# EAGLE board GPS_radiologger_v17 (EAGLE 9.6.2)
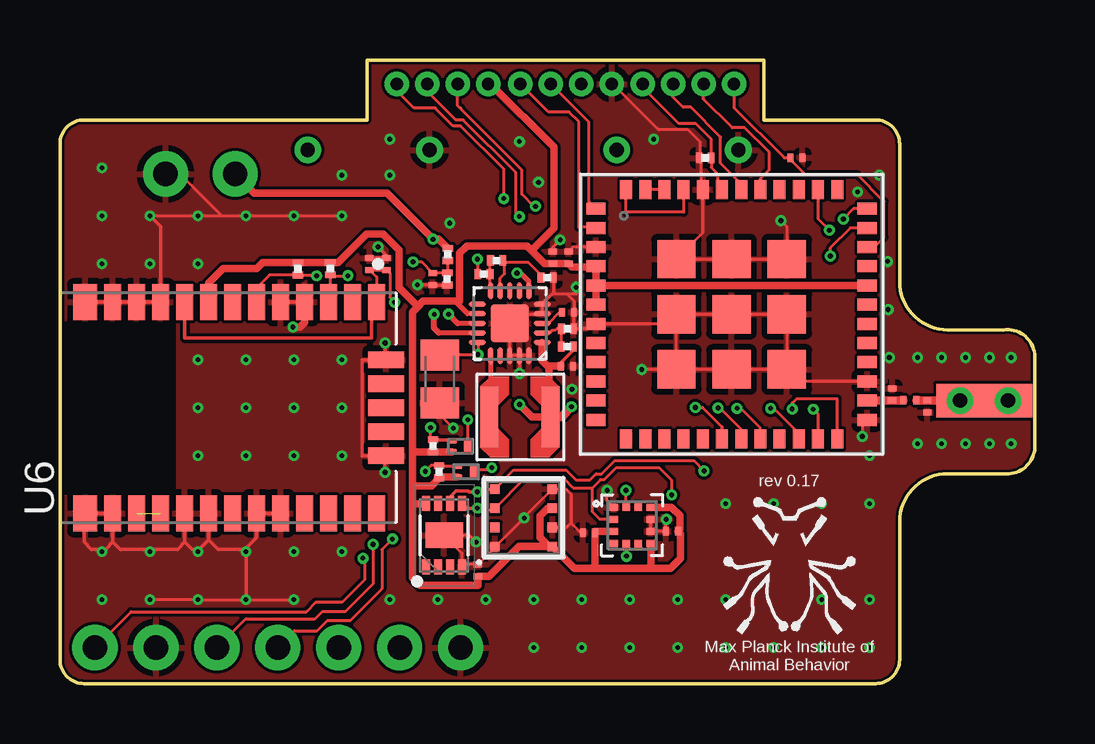
[diagram p0: board, top side]
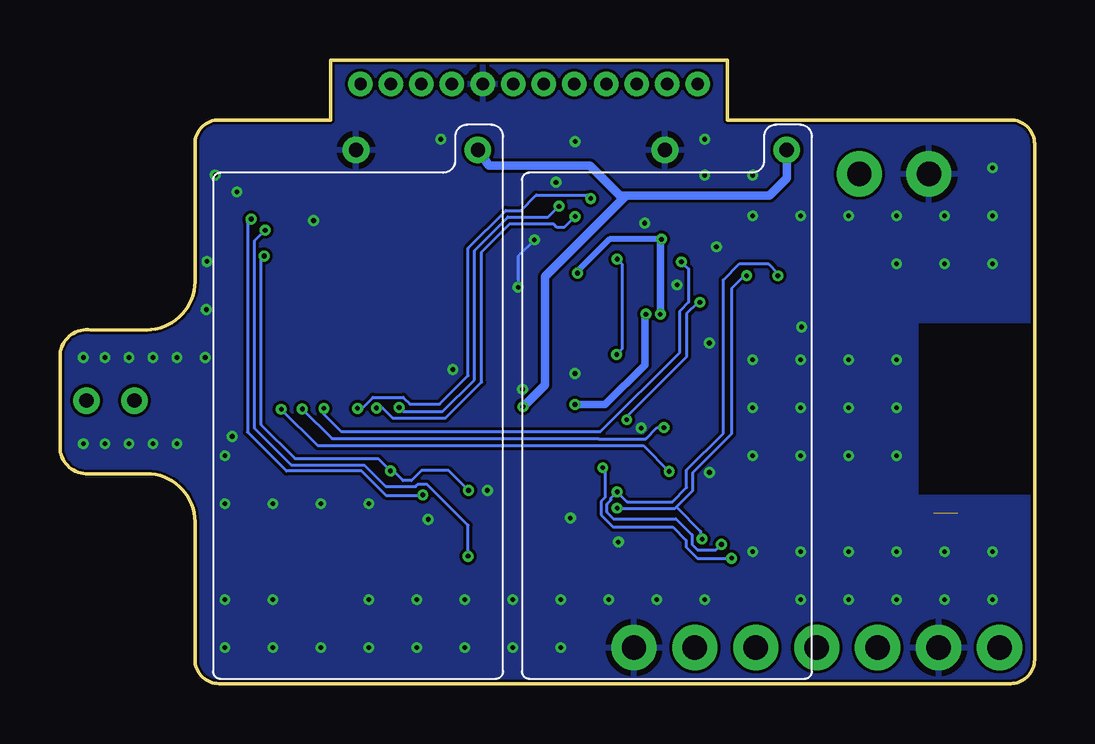
[diagram p1: board, bottom side, seen from below]

Size 40.62 x 26 mm. Coordinates in mm from the lower left corner, seen from the top.
Outline: 35,6.75 35,1 arc-90 34,0 1,0 arc-90 0,1 0,22.5 arc-90 1,23.5 12.8,23.5 12.8,26 29.35,26 29.35,23.5 34,23.5 arc-90 35,22.5 35,16.75 arc90 37,14.75 39.35,14.75 arc-90 40.62,13.75 40.62,9.75 arc-90 39.35,8.75 37,8.75 arc90 35,6.75
Copper layers (1*16): Top 0.035mm / dielectric 0.2mm / Bottom 0.035mm
Design rules "default *": minimum track width 5mil, minimum drill 0.2mm, track to track 5mil, track to pad 5mil, pad to pad 5mil, via to via 5mil, smd to smd 5mil, copper to edge 4mil, drill to drill 4mil, minimum pad ring 10mil, minimum via ring 5mil, stop-mask expansion 0mil, vias tented up to drill 12mil, thermal gap 10mil
Net classes: 1 power: width 0.305 mm; 2 antenna: width 0.356 mm, clearance 0.178 mm; 3 battery: width 0.254 mm

## Footprints (pad centres in the part's own frame; a part is rotated, then mirrored left to right if it is on the bottom)
C0201 = smd 0.25 x 0.35: 1 -0.25,0; 2 0.25,0
L0201 = smd 0.25 x 0.35: 1 -0.275,0; 2 0.275,0
C0805K = smd 1.3 x 1.6: 1 -1,0; 2 1,0
SON50P300X200X55-9N = smd 0.63 x 0.32: 1 -1.33,0.75; 2 -1.33,0.25; 3 -1.33,-0.25; 4 -1.33,-0.75; 5 1.33,-0.75; 6 1.33,-0.25; 7 1.33,0.25; 8 1.33,0.75 | smd 1.06 x 1.56: 9 0,0
1X01_NO_SILK = drill 1.016 pad 1.88: 1 0,0
1X04_1.27MM_NO_SILK = drill 0.508 pad 1: 1 0,0; 2 1.27,0; 3 2.54,0; 4 3.81,0
1X07_NO_SILK = drill 1.016 pad 1.88: 1 0,0; 2 2.54,0; 3 5.08,0; 4 7.62,0; 5 10.16,0; 6 12.7,0; 7 15.24,0
SOT883(B) = smd 0.4 x 0.25: 1 -0.35,0.225; 2 -0.35,-0.225 | smd 0.4 x 0.7: 3 0.35,0
R0201 = smd 0.28 x 0.43: 1 -0.255,0; 2 0.255,0
TYPEABZ = smd 0.8 x 0.5: P$1 -5.65,4.4; P$2 -5.65,3.6; P$3 -5.65,2.8; P$4 -5.65,2; P$5 -5.65,1.2; P$6 -5.65,0.4; P$7 -5.65,-0.4; P$8 -5.65,-1.2; P$9 -5.65,-2; P$10 -5.65,-2.8; P$11 -5.65,-3.6; P$12 -5.65,-4.4; P$25 5.65,-4.4; P$26 5.65,-3.6; P$27 5.65,-2.8; P$28 5.65,-2; P$29 5.65,-1.2; P$30 5.65,-0.4; P$31 5.65,0.4; P$32 5.65,1.2; P$33 5.65,2; P$34 5.65,2.8; P$35 5.65,3.6; P$36 5.65,4.4 | smd 0.5 x 0.8: P$13 -4.4,-5.2; P$14 -3.6,-5.2; P$15 -2.8,-5.2; P$16 -2,-5.2; P$17 -1.2,-5.2; P$18 -0.4,-5.2; P$19 0.4,-5.2; P$20 1.2,-5.2; P$21 2,-5.2; P$22 2.8,-5.2; P$23 3.6,-5.2; P$24 4.4,-5.2; P$37 4.4,5.2; P$38 3.6,5.2; P$39 2.8,5.2; P$40 2,5.2; P$41 1.2,5.2; P$42 0.4,5.2; P$43 -0.4,5.2; P$44 -1.2,5.2; P$45 -2,5.2; P$46 -2.8,5.2; P$47 -3.6,5.2; P$48 -4.4,5.2 | smd 1.6 x 1.6: P$49 -2.3,2.3; P$50 0,2.3; P$51 2.3,2.3; P$52 -2.3,0; P$53 0,0; P$54 2.3,0; P$55 -2.3,-2.3; P$56 0,-2.3; P$57 2.3,-2.3
XDCR_BMA400 = smd 0.35 x 0.3: 1 -0.775,0.75; 2 -0.775,0.25; 3 -0.775,-0.25; 4 -0.775,-0.75; 7 0.775,-0.75; 8 0.775,-0.25; 9 0.775,0.25; 10 0.775,0.75 | smd 0.3 x 0.35: 5 -0.25,-0.775; 6 0.25,-0.775; 11 0.25,0.775; 12 -0.25,0.775
SPV1050 = smd 0.7 x 0.2: P$1 -1.35,0.8; P$2 -1.35,0.4; P$3 -1.35,0; P$4 -1.35,-0.4; P$5 -1.35,-0.8; P$11 1.35,-0.8; P$12 1.35,-0.4; P$13 1.35,0; P$14 1.35,0.4; P$15 1.35,0.8 | smd 0.2 x 0.7: P$6 -0.8,-1.35; P$7 -0.4,-1.35; P$8 0,-1.35; P$9 0.4,-1.35; P$10 0.8,-1.35; P$16 0.8,1.35; P$17 0.4,1.35; P$18 0,1.35; P$19 -0.4,1.35; P$20 -0.8,1.35 | smd 1.6 x 1.6: P$21 0,0
LGA3.0X3.0 = smd 0.4 x 0.4: 1 1.2,1.2; 2 1.2,0.4; 3 1.2,-0.4; 4 1.2,-1.2; 5 -1.2,-1.2; 6 -1.2,-0.4; 7 -1.2,0.4; 8 -1.2,1.2
LCC100P960X1400X210-31N = smd 1.5 x 0.7: 1 4.4,-6.2; 2 4.4,-5.2; 3 4.4,-4.2; 4 4.4,-3.2; 5 4.4,-2.2; 6 4.4,-1.2; 7 4.4,-0.2; 8 4.4,0.8; 9 4.4,1.8; 10 4.4,2.8; 11 4.4,3.8; 12 4.4,4.8; 15 -4.4,4.8; 16 -4.4,3.8; 17 -4.4,2.8; 18 -4.4,1.8; 19 -4.4,0.8; 20 -4.4,-0.2; 21 -4.4,-1.2; 22 -4.4,-2.2; 23 -4.4,-3.2; 24 -4.4,-4.2; 25 -4.4,-5.2; 26 -4.4,-6.2 | smd 1.5 x 1: 13 4.4,5.95; 14 -4.4,5.95 | smd 0.7 x 1.5: 27 -2,-6.6; 28 -1,-6.6; 29 0,-6.6; 30 1,-6.6; 31 2,-6.6
LPS_3015 = smd 0.75 x 2.54: P$1 -1.3,0; P$2 1.25,0
ICARUS_NITINOL_ANTENNA_SHORT = smd 4 x 1.4: 1 0,0 | drill 0.6: 2 -1,0; 3 1,0
ICARUS_FULL_FOOTPRINT = drill 0.6: P$1 5,11.5; P$3 -0.08,11.5

## Placement (x,y rotation side)
C1  0.1 uF  [C0201]  30.7,21.93 0 top
C2  47 uF  [C0201]  13.6,17.5 90 top
C3  0.1 uF  [C0201]  17.42,4.71 90 top
C4  10nF  [C0201]  21.18,15.48 0 top
C5  100 nF  [C0201]  12.9,17.5 90 top
C6  [C0201]  22.05,6.3 180 top
C7  0.1 uF  [C0201]  15.54,16.87 270 top
C8  [C0201]  25.51,6.35 180 top
C9  1 uF  [C0201]  20.55,17.77 270 top
C10  0.1 uF  [C0201]  21.2,17.77 270 top
C11  0.1uF  [L0201]  35.43,11.81 180 top
C13  47 uF  [C0805K]  15.83,12.7 270 top
C14  4.7 uF  [C0201]  21.13,13.23 0 top
IC4  CAT24M01HU5I-GT3  [SON50P300X200X55-9N]  16.01,6.19 90 top
J1  [1X01_NO_SILK]  7.3,21.25 0 top
J2  [1X04_1.27MM_NO_SILK]  17.85,25 180 top
J3  [1X01_NO_SILK]  4.4,21.25 0 top
J4  [1X04_1.27MM_NO_SILK]  23,25 180 top
J5  [1X04_1.27MM_NO_SILK]  28.1,25 180 top
J7  [1X07_NO_SILK]  16.7,1.5 180 top
L3  [C0201]  34.69,12.06 90 top
L4  [C0201]  36.16,11.56 270 top
PDTA143TMB,1  TINYPICO-PNPAMB  [SOT883(B)]  16.93,8.83 0 top
PDTA143TMB,315  TINYPICO-PNPAMB  [SOT883(B)]  16.69,9.89 0 top
R1  4.7 k  [R0201]  11.27,17.3 90 top
R2  4.7 k  [R0201]  9.92,17.29 90 top
R3  10k  [R0201]  26.89,21.91 0 top
R4  100k  [R0201]  15.55,9.91 270 top
R5  100k  [R0201]  15.8,8.83 270 top
R6  10 M  [R0201]  16.14,16.87 90 top
R7  4.7 M  [R0201]  16.16,17.89 90 top
R8  3M  [R0201]  21.14,14.05 0 top
R9  9.1M  [R0201]  21.16,14.79 180 top
R10  6.2M  [R0201]  17.67,17.07 180 top
R11  1M  [R0201]  18.2,17.64 180 top
R12  3M  [R0201]  20.31,16.93 180 top
U1  TYPEABZ  [TYPEABZ]  28,15.4 0 top
U2  BMA400  [XDCR_BMA400]  23.85,6.6 0 top
U4  SPV1050  [SPV1050]  18.75,15.02 180 top
U5  BME680BME680  [LGA3.0X3.0]  19.33,6.91 180 top
U6  CAM-M8Q-0  [LCC100P960X1400X210-31N]  7,11.5 90 top
U$1  LPS3015  [LPS_3015]  19.14,11.12 180 top
U$2  NITINOL_ANTENNA_SHORT  [ICARUS_NITINOL_ANTENNA_SHORT]  38.52,11.8 0 top
U$3  ICARUS_V4_FOOTPRINT  [ICARUS_FULL_FOOTPRINT]  28.2,10.75 0 bottom
U$4  ICARUS_V4_FOOTPRINT  [ICARUS_FULL_FOOTPRINT]  15.32,10.75 0 bottom

## Library data of the parts
C1-C10 C13 C14 L3 L4 = rcl; SPICEPREFIX: C
C11 = rcl; SPICEPREFIX: L
IC4 = CAT24M01HU5I-GT3-CorrectedV2; ALLIED_NUMBER: 70300250; ALLIED_PRICE-STOCK: http://www.alliedelec.com/on-semiconductor-cat24m01hu5i-gt3/70300250/; DESCRIPTION: EEPROM 1MB I2C SERIAL EEPROM; HEIGHT: 0.55mm; MANUFACTURER_NAME: ON Semiconductor; MANUFACTURER_PART_NUMBER: CAT24M01HU5I-GT3; MOUSER_PART_NUMBER: 863-CAT24M01HU5I-GT3; MOUSER_PRICE-STOCK: https://www.mouser.com/Search/Refine.aspx?Keyword=863-CAT24M01HU5I-GT3; RS_PART_NUMBER: 7814831P; RS_PRICE-STOCK: http://uk.rs-online.com/web/p/products/7814831P
J1-J5 J7 = SparkFun-Connectors
PDTA143TMB,1 PDTA143TMB,315 = UnexpectedMaker
R1-R12 = rcl; SPICEPREFIX: R
U1 = Kris
U2 = BMA400; AVAILABILITY: Unavailable; DESCRIPTION: Accelerometer X, Y, Z Axis ±2g, 4g, 8g, 16g 12-LGA (2x2); MF: Bosch Sensortec; MP: BMA400; PACKAGE: LGA-12 Bosch Tools; PRICE: None
U4 = STM-SPV1050_V2
U5 = SparkFun-Sensors; PROD_ID: IC-14656
U6 = CAM-M8Q-0; AVAILABILITY: Unavailable; DESCRIPTION: CAM-M8 RF Receiver BeiDou, GLONASS, GNSS, GPS 1.575GHz -167dBm On-Board, Chip Module; MF: U-Blox America; MP: CAM-M8Q-0; PACKAGE: SMD-31 u-blox; PRICE: None
U$1 = coilcraft_custom
U$2 = Antenna_mounts
U$3 U$4 = TrisolX_Solar_Cells

## Nets
ACC_INT: U1.P$38 U2.5
BAT [battery]: J1.1 R7.2 U4.P$6 U4.P$14
BOOT: J5.4 R3.2 U1.P$43
DM: J4.4 U1.P$2
DP: J4.3 U1.P$1
GND: C1.2 C2.2 C3.2 C4.2 C5.2 C6.2 C7.2 C8.2 C9.1 C10.1 C13.2 C14.2 IC4.4 IC4.9 J3.1 J4.1 J7.1 J7.6 L3.2 L4.2 R3.1 R6.1 R9.1 R12.1 U1.P$3 U1.P$7 U1.P$25 U1.P$27 U1.P$44 U1.P$49 U1.P$50 U1.P$51 U1.P$52 U1.P$53 U1.P$54 U1.P$55 U1.P$56 U1.P$57 U2.1 U2.8 U2.9 U4.P$4 U4.P$5 U4.P$18 U4.P$19 U4.P$20 U4.P$21 U5.1 U5.5 U5.7 U6.4 U6.5 U6.10 U6.11 U6.12 U6.13 U6.14 U6.15 U6.18 U6.19 U6.21 U6.22 U6.27 U6.31 U$3.P$3 U$4.P$3
N$1: U1.P$45 U1.P$48
N$2 [antenna]: C11.2 L3.1 U1.P$26
N$4: U4.P$16 U$1.P$2
N$6: R8.1 R9.2 U4.P$2
N$7 [battery]: C14.1 R8.2 U4.P$1 U4.P$13 U$1.P$1 U$3.P$1 U$4.P$1
N$8: R10.1 R11.2 U4.P$10
N$9: R11.1 R12.2 U4.P$9
N$11 [antenna]: C11.1 L4.1 U$2.1 U$2.2 U$2.3
N$12: C13.1 R10.2 U4.P$15
N$13: C4.1 U4.P$3
N$16: U6.16 U6.17
N$18: J4.2
POWER [power]: C3.1 C6.1 C8.1 C9.2 C10.2 IC4.8 J2.1 PDTA143TMB,1.2 PDTA143TMB,315.2 R1.2 R2.2 R4.2 R5.2 U1.P$4 U1.P$5 U1.P$6 U1.P$32 U2.3 U2.7 U2.10 U4.P$12 U5.6 U5.8 U6.8
PWM: J7.2
RDY: J7.3
RST: C1.1 J5.1 U1.P$34
RX: J2.2 U1.P$18
SCD_PDTA: PDTA143TMB,1.1 R5.1 U1.P$23
SCD_PWR: J7.7 PDTA143TMB,1.3
SCL: IC4.6 J7.5 R2.1 U1.P$35 U2.12 U5.4 U6.6
SDA: IC4.5 J7.4 R1.1 U1.P$36 U2.2 U5.3 U6.3
SWDCLK: J5.3 U1.P$42
SWDIO: J5.2 U1.P$41
TCXO_OUT: U1.P$46 U1.P$47
TX: J2.3 U1.P$19
VBUS: J2.4 U1.P$20
VOLT_MEAS: C7.1 R6.2 R7.1 U1.P$22
ZOE_PDTA: PDTA143TMB,315.1 R4.1 U1.P$24
ZOE_PWR: C2.1 C5.1 PDTA143TMB,315.3 U6.1 U6.9

## Tracks (layer width: path | path; a pad name or v marks a point on that pad's centre or on a via)
ACC_INT  (via drill 0.2)
  Top 0.127: v32.08,18.9 31.6,19.38 U1.P$38 | U2.5 v23.6,5.32 v23.61,5.31
  Bottom 0.127: v32.08,18.9 32.52,18.45 32.52,10.65 30.98,9.11 27.94,9.11 27.04,8.21 25.79,8.21 25.68,8.32 25.34,8.32 23.61,6.59 v23.61,5.31
BAT  (via drill 0.2)
  Top 0.2: U4.P$14 15.8,14.62
  Top 0.203: v19.05,17.11 19.2,17.11 19.55,16.77 U4.P$6
  Top 0.254: 15.8,14.62 15.59,14.83 15.59,15.41 15.6,15.43 v15.6,15.4
  Top 0.305: J1.1 8.1,20.45 13.62,20.45 v15.55,18.52 15.79,18.52 R7.2
  Bottom 0.254: v15.55,18.52 17.71,18.52 19.05,17.19 v19.05,17.11
  Bottom 0.305: v15.6,15.4 15.6,18.48 v15.55,18.52
BOOT
  Top 0.127: U1.P$43 27.4,20.6 27.4,21.27 27.15,21.52 R3.2 27.15,22.7 26.5,23.35 25.8,23.35 24.3,24.85 24.3,25.19 J5.4
DM
  Top 0.127: U1.P$2 22.32,19.02 21.62,19.02 21.62,23.43 21.23,23.82 20.36,23.82 J4.4
DP
  Top 0.127: U1.P$1 22.05,20.1 22.05,23.41 J4.3
GND  (via drill 0.2)
  Top 0.127: C4.2 21.48,15.48 | 22.15,14.8 U1.P$7 25.3,15 U1.P$52 | C4.2 21.41,15.47 R9.1 | U4.P$20 U4.P$19 | U4.P$19 U4.P$18 U4.P$21 19.11,15.38 | R12.1 20.57,16.33 20.1,15.87 U4.P$5 | 19.15,15.42 19.11,15.38 | U4.P$5 20.52,16.25 21.12,16.25 | 21.12,16.25 21.52,16.25 v21.52,16.52 | 21.12,16.25 21.43,15.95 C4.2 | C5.2 C2.2 13.63,17.72 | 20.53,6.57 U5.7 21.1,6.5 21.3,6.7 | U1.P$52 U1.P$53 U1.P$54 U1.P$57 | U1.P$57 U1.P$56 U1.P$55 | U1.P$55 U1.P$52 | IC4.9 16.76,5.44 IC4.4 16.86,4.96 C3.2 18.13,5.67 U5.1 18.16,5.71 v19.35,6.9 19.35,6.93 U5.5 21.09,8.11 21.3,7.9 21.3,6.7 | 16.14,6.06 IC4.9 | C10.1 21.39,18.2 U1.P$3 | v3.75,3.5 v5.75,3.5 v7.75,3.5 v9.75,3.5 | R6.1 C7.2 v14.91,16.62 v14.9,16.62 | J4.1 23.05,25.15 23.05,25 24.96,23.09 26.18,23.09 26.7,22.57 26.7,21.98 R3.1 26.71,21.84 26.71,20.6 U1.P$44 26.8,18.8 U1.P$49 U1.P$50 U1.P$51 30.3,19.05 v30.05,19.3 | 19.11,15.38 20.07,15.38 U4.P$4 U4.P$5 | 21.36,12.28 v21.34,12.27 | 16.15,11.38 C13.2 15.83,11.21 v16.39,10.65 | U1.P$25 | v33.45,10.3 33.45,11 U1.P$25 | U1.P$55 v24.25,13.1 | v17.35,5.9 17.06,6.19 IC4.9 | v13.55,8.8 13.55,9.45 13.5,9.5 | U1.P$27 30.8,12.6 U1.P$57 | v11.75,19.5 v9.75,19.5 v7.75,19.5 | v7.75,19.5 v5.75,19.5 v3.75,19.5 | v7.75,19.5 6.75,19.5 4.97,21.28 J3.1 | 33.66,11 U1.P$25 | U4.P$19 v19.16,12.93 | U2.9 U2.8 C8.2 v25.26,6.84 v25.27,6.84 | C6.2 21.7,6.3 21.3,6.7 | U2.1 22.81,7.62 v22.81,8.05
  Top 0.152: U6.27 13.5,9.5 12.6,9.5 12.6,13.5 U6.31 13.55,13.5 v13.55,14.2 | U6.22 U6.21 8.2,6.1 7.7,5.6 | 7.7,5.6 6.6,5.6 6.2,6 | 6.2,6 U6.19 | 6.2,6 5.8,5.6 5.5,5.6 5.2,5.9 | 5.2,5.9 U6.18 | 5.2,5.9 4.9,5.6 2.5,5.6 2.2,5.9 | 2.2,5.9 U6.15 U6.14 1,7.05 1,5.9 1.3,5.6 1.9,5.6 2.2,5.9 | U6.13 U6.12 U6.11 U6.10 4.2,19.05 v3.75,19.5 | U6.4 U6.5 | 21.5,14.88 R9.1 22.14,14.79 U1.P$7 | 7.7,5.6 7.75,5.55 v7.75,3.5 | C2.2 13.6,17.87 v13.26,18.21 | C9.1 20.55,18.2 v20.85,18.5
  Top 0.305: U6.4 10.2,15.06 10,14.86 v9.71,14.86
  Bottom 0.127: v20.85,18.5 21.52,17.82 v21.52,16.52
  other vias: 31.75,3.5 36.75,10 38.75,10 36.75,13.6 38.75,13.6 37.75,13.6 35.75,13.6 37.75,10 35.75,10 24.75,22.7 1.75,19.5 3.75,17.5 1.75,17.5 1.75,21.5 3.75,5.5 5.75,5.5 1.75,3.5 1.75,5.5 7.75,5.5 7.75,9.5 7.75,11.5 7.75,13.5 5.75,13.5 5.75,11.5 5.75,9.5 9.75,9.5 11.75,9.5 11.75,11.5 9.75,11.5 9.75,13.5 11.75,13.5 9.75,5.5 11.75,5.5 5.75,17.5 13.75,3.5 15.75,3.5 17.75,3.5 19.75,3.5 21.75,3.5 23.75,3.5 25.75,3.5 33.75,3.5 33.75,7.5 31.75,7.5 34.15,21.2 34.5,17.6 34.52,15.6 34.58,13.6 39.65,13.6 39.65,10 13.75,21.2 11.75,21.2 13.75,22.7 16.25,19.2 33.25,20.5 19.95,20.9 19.15,22.6 19.75,1.5 21.75,1.5 23.75,1.5 25.75,1.5 27.75,1.5 29.75,1.5 31.75,1.5 33.75,1.5 27.75,3.5 29.75,7.5 27.75,7.5 33.75,9.5
  pour Top: -1.1,26.95 40.65,26.95 40.65,-0.75 -1.6,-0.75 -1.6,7.8 4.9,7.8 4.9,15.1 -1.1,15.1
  pour Bottom: -0.68,27.2 40.6,27.2 40.6,-0.7 -0.4,-0.7 -0.4,7.8 4.9,7.8 4.9,15.1 -0.68,15.1
N$1
  Top 0.127: U1.P$45 26,19.65 23.6,19.65 U1.P$48
N$2
  Top 0.356: C11.2 L3.1 U1.P$26
N$4
  Top 0.203: U4.P$16 17.95,11.18 U$1.P$2
N$6
  Top 0.127: R8.1 20.89,14.78 R9.2 20.71,14.79 20.64,14.72 20.52,14.72 20.42,14.62 U4.P$2
N$7  (via drill 0.2)
  Top 0.15: C14.1 20.88,13.38 21.4,13.9 R8.2
  Top 0.2: U4.P$13 16.58,15.02
  Top 0.254: 16.58,15.02 v16.2,15.4
  Top 0.305: v19.16,11.63 19.68,11.12 U$1.P$1 20.39,11.16 20.39,13.17 | U4.P$1 20.1,13.46 20.39,13.17 | 20.39,13.17 20.45,13.23 C14.1
  Top 0.356: v21.32,11.54 20.9,11.12 U$1.P$1
  Bottom 0.305: v16.2,15.4 16.25,15.35 16.25,13.28 17.9,11.63 v19.16,11.63
  Bottom 0.356: U$4.P$1 10.32,21.07 11.05,20.35 17.02,20.35 | v21.32,11.54 21.32,11.53 20.4,12.45 20.4,16.98 17.02,20.35 | 17.02,20.35 17.27,20.35 18.52,21.6 22.75,21.6 U$3.P$1
N$8
  Top 0.127: U4.P$10 17.93,16.39 R10.1 17.93,17.62 R11.2
N$9
  Top 0.127: R12.2 20.05,17.03 19.52,17.56 18.54,17.56 | R11.1 18.54,17.56 | U4.P$9 18.35,16.9 18.54,17.09 18.54,17.56
N$11
  Top 0.356: U$2.3 U$2.1 U$2.2 L4.1 C11.1
N$12  (via drill 0.2)
  Top 0.127: U4.P$15 17.42,14.2 v17.42,13.72 17.4,13.7 C13.1 | v17.4,17.7 17.41,17.68 R10.2
  Bottom 0.127: v17.42,13.72 17.2,13.94 17.2,17.5 v17.4,17.7
N$13
  Top 0.127: U4.P$3 20.12,15 20.34,15 20.82,15.48 C4.1
N$16  (1 unrouted)
POWER
  Top 0.2: U4.P$12 16.98,15.42 16.46,15.94
  Top 0.305: U6.8 6.2,16.7 6.8,17.3 8.21,17.3 8.45,17.55 R2.2 R1.2 11.6,17.55 12.78,18.74 13.46,18.74 14.13,18.07 14.13,16.52 14.93,15.72 | U1.P$5 U1.P$4 22.31,17.36 21.35,17.36 C10.2 C9.2 20.2,17.52 19.66,18.06 | U1.P$5 U1.P$6 | 19.66,18.06 19.47,18.25 16.97,18.25 16.66,17.94 16.66,15.94 16.46,15.94 15.14,15.94 14.93,15.72 | 14.7,7.5 15.24,7.5 IC4.8 | 14.7,9.65 14.7,15.5 14.93,15.72 | PDTA143TMB,315.2 16.33,9.65 R4.2 14.7,9.65 | PDTA143TMB,1.2 15.84,8.61 R5.2 15.48,8.25 14.7,8.25 | U5.6 20.33,7.31 20,6.98 20,6.1 20.39,5.71 U5.8 | U1.P$32 U1.P$5 | 19.66,18.06 20.59,19 20.59,22.36 17.95,25 J2.1 | 14.7,7.5 14.7,4.4 15,4.1 17.42,4.1 C3.1 17.88,4.46 19.13,5.71 U5.8 | U2.3 22.3,6.35 C6.1 22.3,4.8 | 22.3,4.8 24.63,4.8 | 24.63,4.8 25.45,4.8 25.86,5.21 25.86,6.25 C8.1 25.84,6.42 25.84,7 25.49,7.35 U2.10 | U2.7 24.62,4.8 24.63,4.8 | 14.7,9.65 14.7,8.25 | 14.7,8.25 14.7,7.5 | U5.8 21.44,4.8 22.3,4.8
RST
  Top 0.127: U1.P$34 33.95,18.2 34.35,18.6 34.35,20.1 33.24,21.21 31.07,21.21 30.45,21.83 C1.1 30.19,21.93 28.1,24.02 J5.1
RX  (via drill 0.2)
  Top 0.127: 27.6,10.7 26.79,11.52 v26.49,11.52 | 16.7,24 16.7,23.97 | 16.7,23.97 19.25,21.41 19.25,20.4 19.77,19.88 | 16.7,23.97 16.58,24.09 J2.2
  Top 0.152: 27.6,10.7 U1.P$18 | v19.82,19.9 19.77,19.95 19.77,19.88
  Bottom 0.127: v26.49,11.52 26.32,11.35 24.67,11.35 23.35,12.66 23.35,18.05 21.95,19.45 20.27,19.45 v19.82,19.9
SCD_PDTA  (via drill 0.2)
  Top 0.127: PDTA143TMB,1.1 15.84,9.05 R5.1 15.47,9.09 v15.23,8.84 | v31.4,11.44 31.6,11.24 U1.P$23
  Bottom 0.127: v31.4,11.44 29.88,9.92 16.31,9.92 v15.23,8.84
SCD_PWR  (via drill 0.2)
  Top 0.127: PDTA143TMB,1.3 17.37,8.92 17.92,8.92 v18,9 | J7.7 2.96,3 10.28,3 10.68,3.4 11.78,3.4 12.7,4.33 12.7,5.15 v12.63,5.22
  Bottom 0.127: v18,9 17.9,8.9 17.9,7.76 18.07,7.59 18.07,7.03 17.56,6.53 15.07,6.53 14.53,5.98 14.53,5.7 14.06,5.22 v12.63,5.22
SCL  (via drill 0.2)
  Top 0.127: U1.P$35 32.95,19 32.12,18.17 v32.12,17.82 | 18.11,8.09 U5.4 18.92,8.9 21.1,8.9 21.5,8.5 22.1,8.5 22.35,8.75 22.58,8.75 23.13,9.3 26.42,9.3 v26.85,8.87 | 16.26,7.69 IC4.6 | 8.2,16.5 8.73,17.04 R2.1 10.77,17.04 10.8,17 v10.7,17 | U2.12 23.6,7.96 23.59,7.96 v23.59,8.05 | J7.5 7.74,2.7 10.64,2.7 10.95,3.01 11.9,3.01 13.05,4.15 13.05,5.57 | v13.05,5.8 13.05,5.57 | 13.05,5.57
  Top 0.152: U6.6 8.2,16.5 | 16.26,7.69 16.26,7.78 16.52,8.04 17.01,8.04 17.05,7.99 v17.4,7.99 17.5,8.09 18.11,8.09
  Bottom 0.127: v10.7,17 10.7,17.1 11.1,17.5 12.3,17.5 12.98,16.82 12.98,10.43 14.5,8.9 14.5,8.18 15.1,7.58 16.98,7.58 v17.4,7.99 17.65,7.75 17.65,7.66 17.82,7.49 17.82,7.14 17.55,6.88 14.95,6.88 14.28,6.2 14.28,5.8 14.05,5.58 13.28,5.58 v13.05,5.8 | v32.12,17.82 32.26,17.68 32.26,10.81 30.82,9.38 27.36,9.38 v26.85,8.87 26.73,8.87 26.32,8.46 25.98,8.46 25.56,8.88 24.43,8.88 v23.59,8.05
SDA  (via drill 0.2)
  Top 0.127: U1.P$36 33.08,19.8 v32.66,19.37 | U6.3 11.27,15.97 R1.1 11.31,17 v12,17 | 17.5,7.31 17.6,7.21 18.03,7.21 U5.3 19.32,8.5 21.06,8.5 21.39,8.16 22.2,8.16 | v25.5,7.87 25.5,8.47 24.98,8.99 23.18,8.99 22.68,8.5 22.53,8.5 22.2,8.16 | U2.2 22.5,6.85 22.2,7.15 22.2,8.16 | J7.4 9.78,2.2 10.72,2.2 11.15,2.63 12.11,2.63 13.43,3.95 13.43,5.59 v13.86,6.03
  Top 0.152: 17.5,7.31 v17.4,7.31 16.97,7.31 IC4.5
  Bottom 0.127: v12,17 12.1,17 12.63,16.47 12.63,10.41 14.25,8.8 14.25,8.05 14.94,7.36 | v25.5,7.87 25.52,7.84 27.04,7.84 28.05,8.86 31.18,8.86 32.8,10.48 32.8,19.22 v32.66,19.37 | v17.4,7.31 14.99,7.31 14.94,7.36 | 14.94,7.36 13.93,6.35 13.93,6.03 v13.86,6.03
SWDCLK
  Top 0.127: J5.3 25.56,24.44 25.98,24.02 26.3,24.02 27.54,22.79 27.54,21.69 28.4,20.83 U1.P$42
SWDIO
  Top 0.127: U1.P$41 29.2,21.05 29.55,21.4 29.55,22.17 28.54,23.18 28.02,23.18 26.83,24.37 J5.2
TCXO_OUT
  Top 0.127: U1.P$46 U1.P$47
TX  (via drill 0.2)
  Top 0.127: v27.43,11.49 27.51,11.49 28.4,10.6 U1.P$19 | v19.15,19.48 19,19.62 19,21.31 16.81,23.5 16.5,23.5 15.31,24.69 J2.3
  Bottom 0.127: v27.43,11.49 27.18,11.49 26.76,11.06 24.55,11.06 23.05,12.57 23.05,17.99 21.87,19.17 20.06,19.17 19.92,19.03 19.59,19.03 v19.15,19.48
VBUS  (via drill 0.2)
  Top 0.127: U1.P$20 29.2,10.65 28.3,11.55 v28.23,11.47 | J2.4 14.04,24.73 14.77,24 15.64,24 16.39,23.25 16.7,23.25 18.5,21.45 v18.5,20.23
  Bottom 0.127: v28.23,11.47 28.04,11.47 27.58,11.93 26.32,11.93 26.04,11.65 24.8,11.65 23.61,12.84 23.61,18.15 22.03,19.73 21.41,19.73 20.77,20.37 18.64,20.37 v18.5,20.23
VOLT_MEAS  (via drill 0.2)
  Top 0.127: R7.1 16.16,17.15 R6.2 C7.1 15.07,17.59 v14.71,17.59 | U1.P$22 30.8,10.43 29.75,11.47 v29.62,11.47
  Bottom 0.127: v29.62,11.47 29.62,11.22 28.91,10.51 18.1,10.51 14.79,13.81 14.79,15.53 14.42,15.9 14.42,17.29 v14.71,17.59
ZOE_PDTA  (via drill 0.2)
  Top 0.127: U1.P$24 32.4,11.88 30.7,11.88 30.52,11.7 v30.52,11.45 | R4.1 15.45,10.28 v15.45,10.67
  Top 0.152: PDTA143TMB,315.1 16.29,10.16 R4.1
  Bottom 0.127: v30.52,11.45 29.29,10.21 18.18,10.21 18.17,10.2 16.2,10.2 15.73,10.67 v15.45,10.67
ZOE_PWR  (via drill 0.2)
  Top 0.127: PDTA143TMB,315.3 17,9.93 v17,11 | C5.1 13.2,16.95 U6.1 | C2.1 13.75,17.1 13.75,16.09 v13.95,15.89
  Top 0.152: U6.9 5.2,14.4 12.98,14.4 12.98,15.68 U6.1 | C2.1 C5.1
  Bottom 0.127: v17,11 17,11.13 14.49,13.64 14.49,15.44 14.04,15.89 v13.95,15.89

## Text on the board
tPlace: rev 0.17 | Max Planck Institute of / Animal Behavior
tValues: - | +